# EAGLE board driveher (EAGLE 6.4)
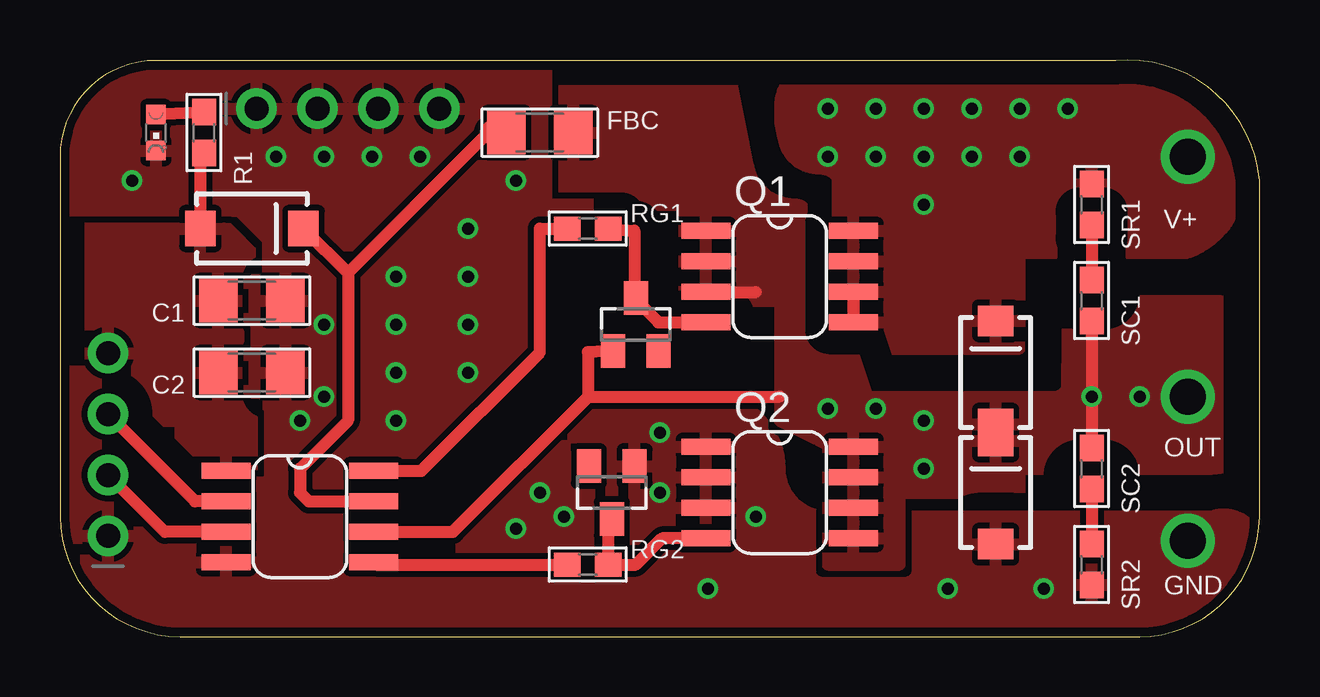
[diagram p0: board, top side]
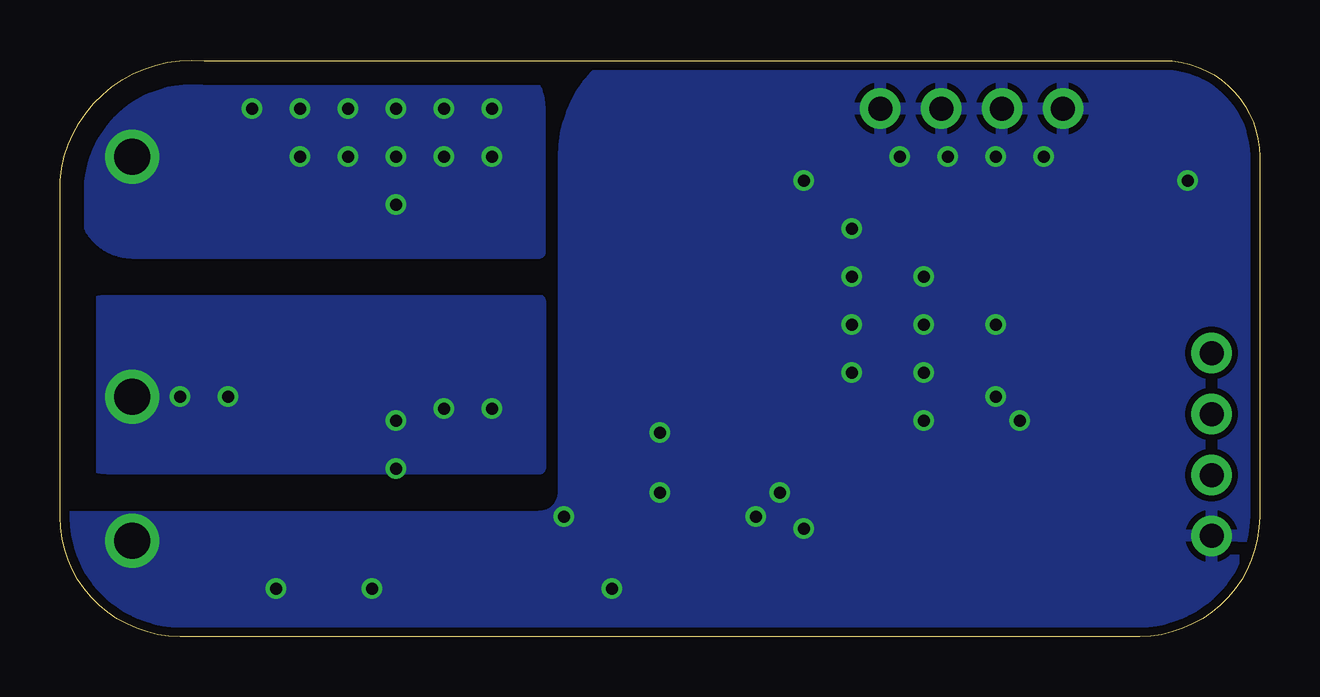
[diagram p1: board, bottom side, seen from below]

Size 50 x 24.02 mm. Coordinates in mm from the lower left corner, seen from the top.
Outline: 44,24 4,24 arc90 0,20 0,5 arc90 5,0 45,0 arc90 50,5 50,19 arc90 44,24
Copper layers (1*16): Top 0.0356mm / dielectric 1.5011mm / Bottom 0.0356mm
Design rules "LaenPCBOrder *": minimum track width 6mil, minimum drill 13mil, track to track 6mil, track to pad 6mil, pad to pad 6mil, via to via 6mil, smd to smd 6mil, copper to edge 15mil, drill to drill 6mil, minimum pad ring 7mil, minimum via ring 7mil, stop-mask expansion 4mil, vias tented up to drill 0.55mm, thermal gap 10mil

## Footprints (pad centres in the part's own frame; a part is rotated, then mirrored left to right if it is on the bottom)
1206 = smd 1.6 x 1.8: 1 -1.4,0; 2 1.4,0
SOT23 = smd 1 x 1.4: 1 -0.95,-1.1; 2 0.95,-1.1; 3 0,1.1
SMA-DIODE = smd 1.27 x 1.47: A -2.15,0; C 2.15,0
1X04_ROUND = drill 1 pad 1.676: 1 -3.81,0; 2 -1.27,0; 3 1.27,0; 4 3.81,0
CHIPLED_0603 = smd 0.8 x 0.8: A 0,-0.75; C 0,0.75
SO-08 = smd 0.66 x 2.032: 1 -1.905,-3.073; 2 -0.635,-3.073; 3 0.635,-3.073; 4 1.905,-3.073; 5 1.905,3.073; 6 0.635,3.073; 7 -0.635,3.073; 8 -1.905,3.073
0603 = smd 1.1 x 1: 1 -0.85,0; 2 0.85,0

## Placement (x,y rotation side)
C1  [1206]  8,14 180 top
C2  [1206]  8,11 180 top
D1  [SOT23]  24,13 0 top
D2  [SOT23]  23,6 180 top
FBC  [1206]  20,21 0 top
FBD  SCHOTTKY  [SMA-DIODE]  8,17 0 top
FBD1  SCHOTTKY  [SMA-DIODE]  39,11 90 top
FBD2  SCHOTTKY  [SMA-DIODE]  39,6 90 top
JP1  [1X04_ROUND]  2,8 90 top
JP2  [1X04_ROUND]  12,22 0 top
LED1  [CHIPLED_0603]  4,21 180 top
Q1  PSMN  [SO-08]  30,15 270 top
Q2  PSMN  [SO-08]  30,6 270 top
R1  [0603]  6,21 270 top
RG1  [0603]  22,17 0 top
RG2  [0603]  22,3 0 top
SC1  [0603]  43,14 270 top
SC2  [0603]  43,7 270 top
SR1  [0603]  43,18 270 top
SR2  [0603]  43,3 270 top
U$1  IRS218-67  [SO-08]  10,5 270 top

## Library data of the parts
C1 C2 FBC FBD FBD1 FBD2 JP1 JP2 Q1 Q2 R1 RG1 RG2 SC1 SC2 SR1 SR2 U$1 = nonolith
D1 D2 = diode
LED1 = adafruit

## Nets
12V: C1.2 C2.2 FBD.A JP1.4 R1.2 U$1.1
FLOAT: FBC.1 FBD.C U$1.7
G1: D1.3 Q1.4 RG1.2
G2: D2.3 Q2.4 RG2.2
GND: C1.1 C2.1 D2.1 FBD2.A JP1.1 JP2.1 JP2.2 JP2.3 JP2.4 LED1.C Q2.1 Q2.2 Q2.3 SR2.2 U$1.4
HIN: JP1.3 U$1.2
HOUT: RG1.1 U$1.8
LIN: JP1.2 U$1.3
LOUT: RG2.1 U$1.5
N$1: LED1.A R1.1
N$2: SC1.1 SR1.2
OUT: D1.1 FBC.2 FBD1.A FBD2.C Q1.1 Q1.2 Q1.3 Q2.5 Q2.6 Q2.7 Q2.8 SC1.2 SC2.1 U$1.6
P2: SC2.2 SR2.1
V+: FBD1.C Q1.5 Q1.6 Q1.7 Q1.8 SR1.1

## Tracks (layer width: path | path; a pad name or v marks a point on that pad's centre or on a via)
12V
  Top 0.5: R1.2 5.85,20 FBD.A
  pour Top (isolate 1): 1,17 1,10 2,9 5,9 5,7 8,7 8,16 7,17
FLOAT
  Top 0.5: FBD.C 12,15.15 | 12,15.15 12,9 10,7 10,6 10.37,5.63 U$1.7 | 18,21 17.85,21 12,15.15
  Top 1: FBC.1 18,21
G1
  Top 0.5: 23.94,14.1 D1.3 | RG1.2 23.94,16.91 23.94,14.1 | 23.94,14.1 24.95,13.1 Q1.4
G2
  Top 0.5: Q2.4 25.09,4.09 24,3 RG2.2 22.85,4.75 D2.3
GND  (via drill 0.5, 1.5)
  other vias: 47,4 9,20 17,15 13,20 20,6 25,6 27,2 37,2 41,2 17,17 19,19 11,20 17,13 17,11 14,15 14,13 14,11 19,4.5 25,8.5 21,5 14,9 15,20 3,19 11,13 11,10 10,9 29,5
  pour Top (isolate 0.254, rank 6): 5,0 46,0 arc90 50,4 arc90 48,5 32,5 arc-90 30,7 arc90 27,10 25,10 arc-90 22,13 22,22 arc90 19,25 5,25 arc90 0,20 0,5 arc90
  pour Bottom (isolate 0.254, rank 6): 24,25 5,25 arc90 0,20 0,5 arc90 5,0 46,0 arc90 50,5 30,5 arc-90 29,6 29,20 arc90
HIN
  Top 0.5: U$1.2 5.63,5.63 JP1.3
HOUT
  Top 0.5: U$1.8 15.05,6.91 20,11.85 20,17 RG1.1
LIN
  Top 0.5: U$1.3 4.37,4.37 JP1.2
LOUT
  Top 0.5: U$1.5 13.17,3 RG2.1
N$1
  Top 0.5: R1.1 LED1.A
N$2
  Top 0.5: SR1.2 SC1.1
OUT  (via drill 0.5, 1.5)
  Top 0.5: U$1.6 16.36,4.37 22,10 | 22,10 30,10 | D1.1 22,11.85 22,10 | SC1.2 v43,10 SC2.1 | 28,14.35 29,14.35
  other vias: 47,10 32,9.5 34,9.5 36,9 36,7 45,10
  pour Top (isolate 1): 26,18 26,14 30,14 30,9 32,8 32,3 35,3 35,8 34,9 31.11,17.66 arc72 30.64,18 arc-79 28.68,19.61 28,23 21,23 21,18
  pour Top (isolate 1.5, rank 5): 50,9 50,12 arc90 48,14 41,14 41,11 32,11 32,3 35,3 35,6 40,6 40,7 48,7 arc90
  pour Bottom (isolate 1.5): 30,7 48,7 arc90 50,9 50,12 arc90 48,14 30,14
P2
  Top 0.5: SC2.2 SR2.1
V+  (via drill 0.5, 1.5)
  Top 0.5: Q1.6 Q1.5
  other vias: 47,20 32,22 32,20 36,20 34,20 34,22 36,22 38,22 38,20 40,20 40,22 42,22 36,18
  pour Top (isolate 1, rank 3): 47,24 32,24 arc90 30,22 30,12 40,12 40,16 47,16 arc90 49,20 49,22 arc90
  pour Bottom (isolate 1): 30,16 30,22 arc-90 32,24 44,24 arc-90 49,19 49,18 arc-90 47,16

## Text on the board
tNames: V+ | OUT | GND